# EAGLE board AutoSpiel (EAGLE 9.2.0)
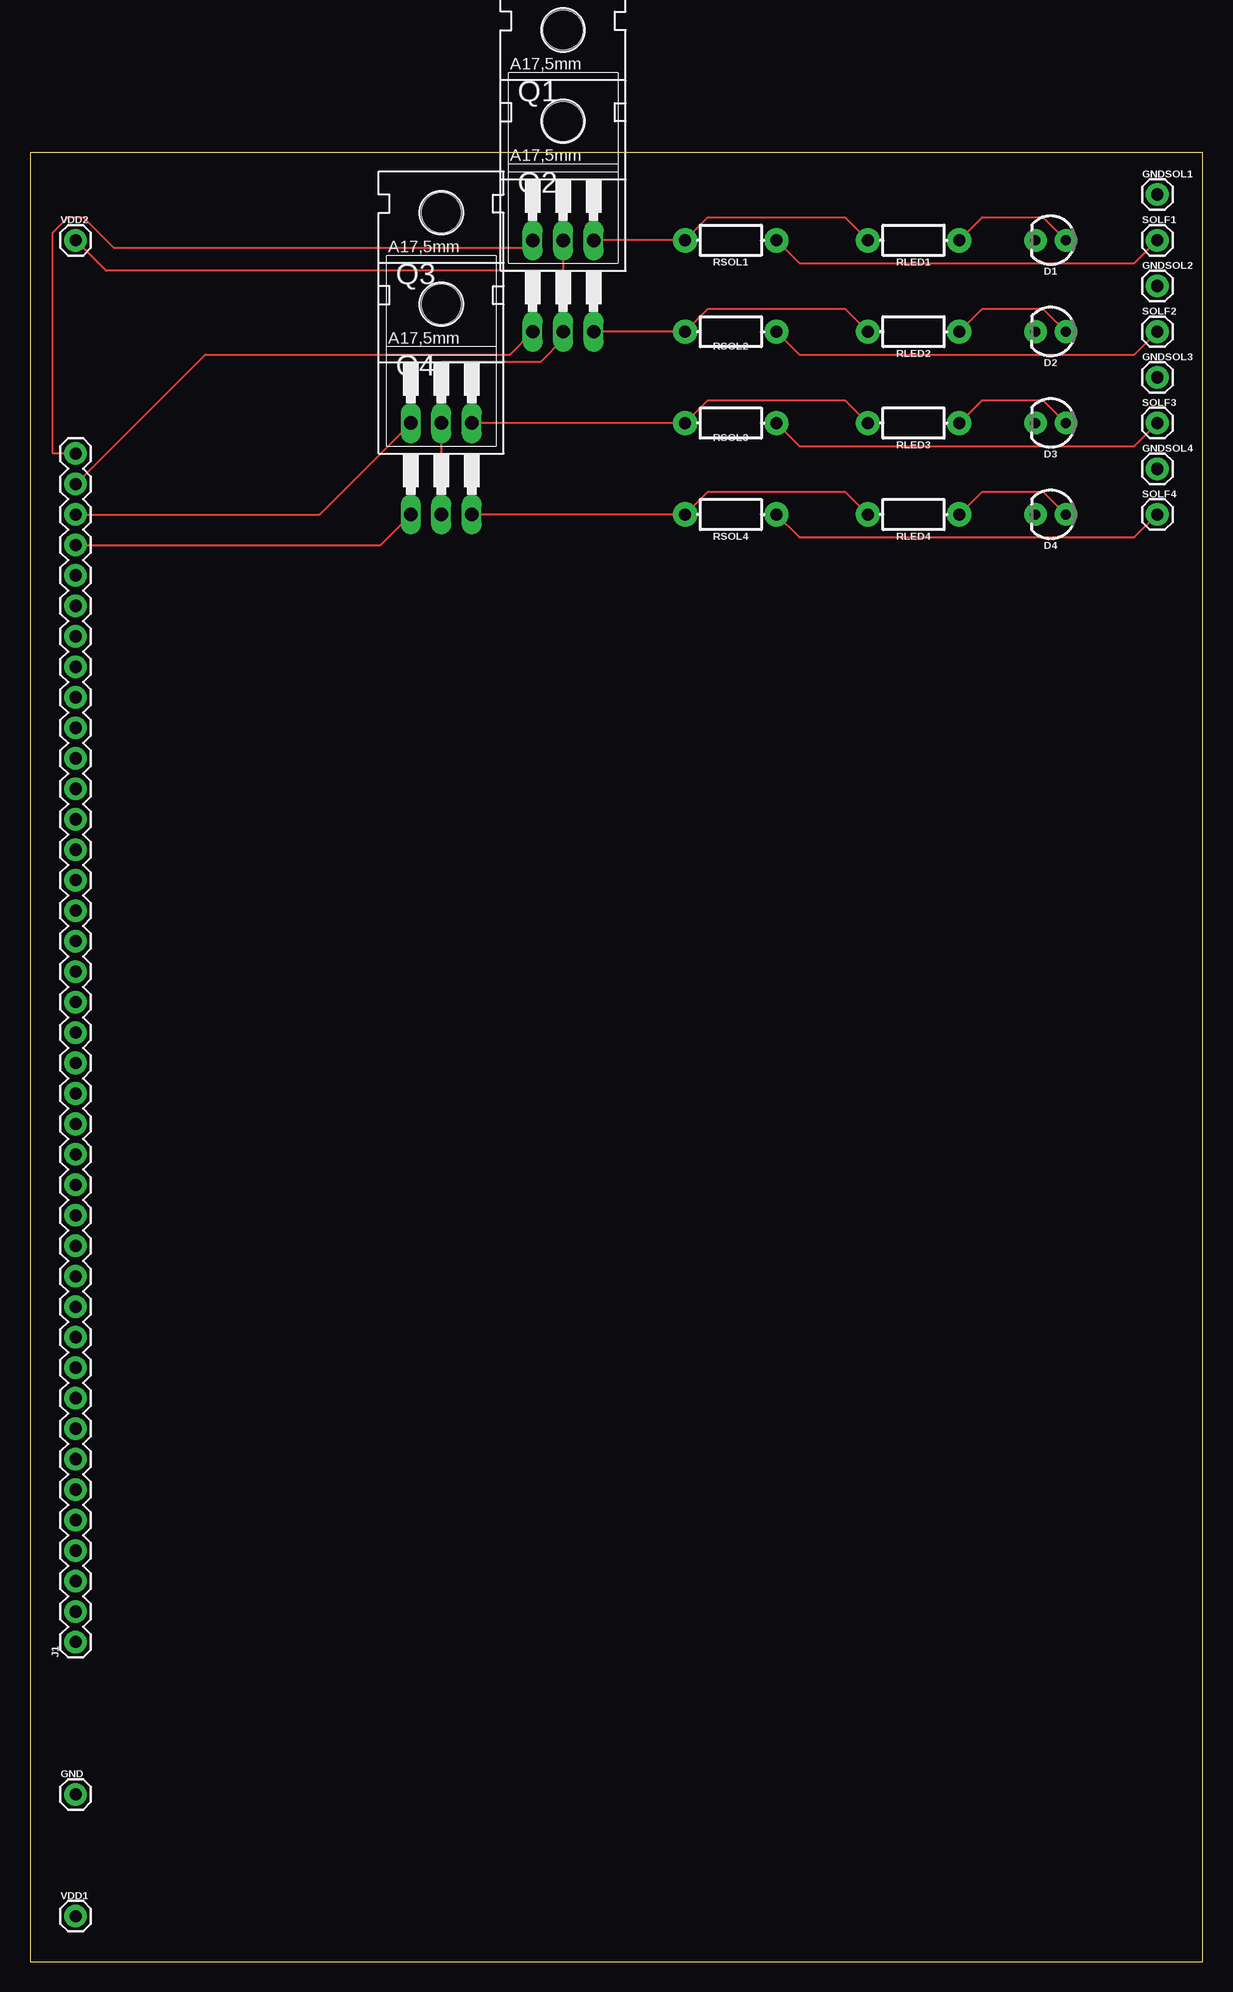
[diagram p0: board, top side]
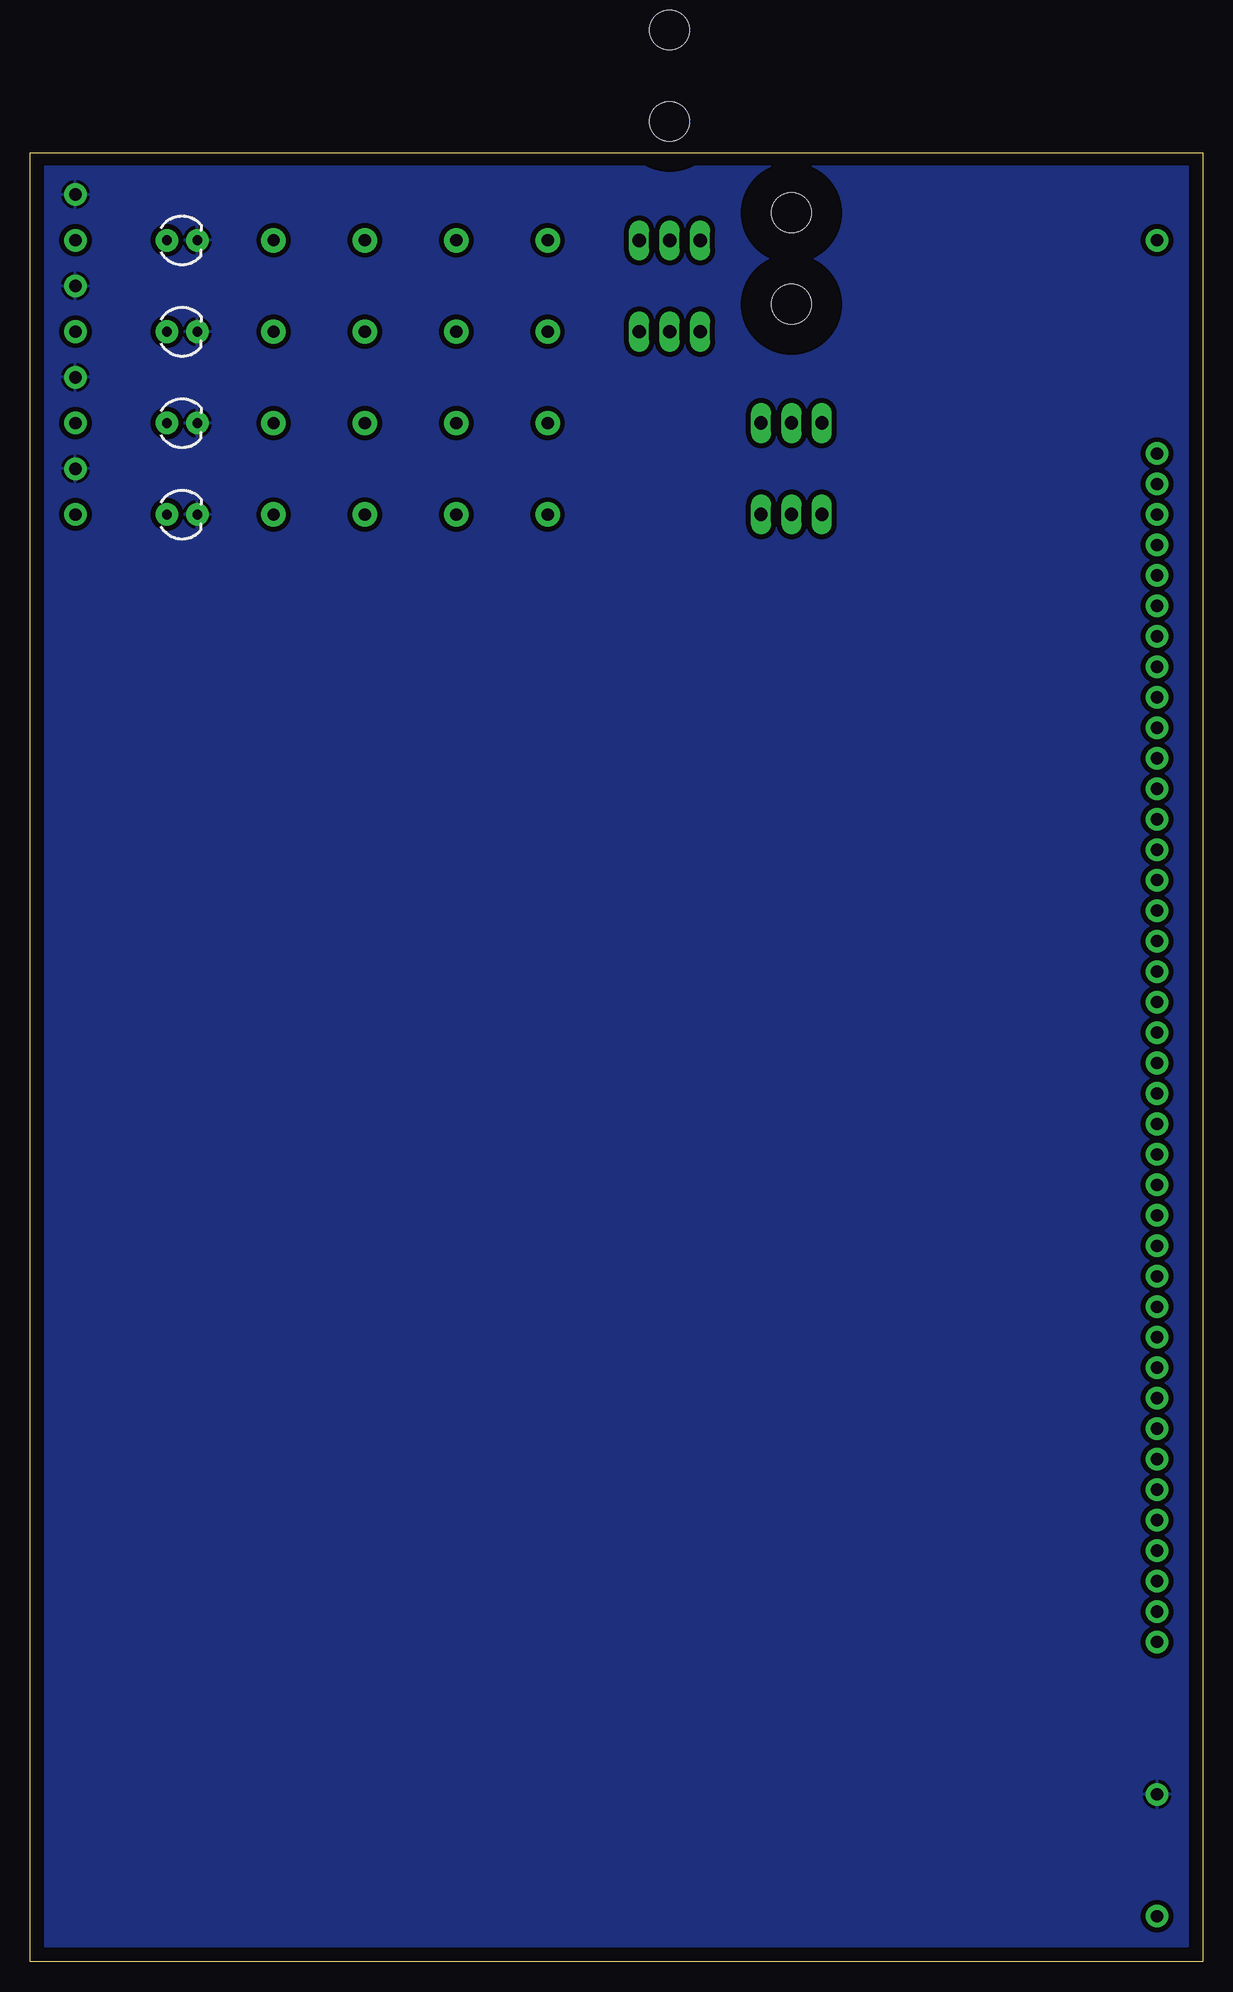
[diagram p1: board, bottom side, seen from below]

Size 97.77 x 150.8 mm. Coordinates in mm from the lower left corner, seen from the top.
Outline: 0,0 97.77,0 97.77,150.8 0,150.8 0,0
Copper layers (1*16): Top 0.035mm / dielectric 1.5mm / Bottom 0.035mm
Design rules "default *": minimum track width 6mil, minimum drill 0.35mm, track to track 16mil, track to pad 16mil, pad to pad 16mil, via to via 16mil, smd to smd 6mil, copper to edge 40mil, drill to drill 16mil, minimum pad ring 10mil, minimum via ring 8mil, stop-mask expansion 4mil, vias tented up to drill 0mil, thermal gap 10mil

## Footprints (pad centres in the part's own frame; a part is rotated, then mirrored left to right if it is on the bottom)
LED_3MM = drill 0.813 pad 1.88: A -1.27,0; K 1.27,0
1X01 = drill 1.016 pad 1.88: 1 0,0
1X40 = drill 1.016 pad 1.88: 1 0,0; 2 2.54,0; 3 5.08,0; 4 7.62,0; 5 10.16,0; 6 12.7,0; 7 15.24,0; 8 17.78,0; 9 20.32,0; 10 22.86,0; 11 25.4,0; 12 27.94,0; 13 30.48,0; 14 33.02,0; 15 35.56,0; 16 38.1,0; 17 40.64,0; 18 43.18,0; 19 45.72,0; 20 48.26,0; 21 50.8,0; 22 53.34,0; 23 55.88,0; 24 58.42,0; 25 60.96,0; 26 63.5,0; 27 66.04,0; 28 68.58,0; 29 71.12,0; 30 73.66,0; 31 76.2,0; 32 78.74,0; 33 81.28,0; 34 83.82,0; 35 86.36,0; 36 88.9,0; 37 91.44,0; 38 93.98,0; 39 96.52,0; 40 99.06,0
TO220AH = drill 1.118 long: B -2.54,-6.35; C 0,-6.35; E 2.54,-6.35 | hole 3.302: 0,11.176
AXIAL-0.3-KIT = drill 1.016 pad 2.032: P$1 -3.81,0; P$2 3.81,0

## Placement (x,y rotation side)
D1  [LED_3MM]  85.09,143.51 180 top
D2  [LED_3MM]  85.09,135.89 180 top
D3  [LED_3MM]  85.09,128.27 180 top
D4  [LED_3MM]  85.09,120.65 180 top
GND  [1X01]  3.81,13.97 0 top
GNDSOL1  [1X01]  93.98,147.32 0 top
GNDSOL2  [1X01]  93.98,139.7 0 top
GNDSOL3  [1X01]  93.98,132.08 0 top
GNDSOL4  [1X01]  93.98,124.46 0 top
J1  [1X40]  3.81,26.67 90 top
Q1  TIP120  [TO220AH]  44.45,149.86 0 top
Q2  TIP120  [TO220AH]  44.45,142.24 0 top
Q3  TIP120  [TO220AH]  34.29,134.62 0 top
Q4  TIP120  [TO220AH]  34.29,127 0 top
RLED1  10k  [AXIAL-0.3-KIT]  73.66,143.51 180 top
RLED2  10k  [AXIAL-0.3-KIT]  73.66,135.89 180 top
RLED3  10k  [AXIAL-0.3-KIT]  73.66,128.27 180 top
RLED4  10k  [AXIAL-0.3-KIT]  73.66,120.65 180 top
RSOL1  10k  [AXIAL-0.3-KIT]  58.42,143.51 180 top
RSOL2  10k  [AXIAL-0.3-KIT]  58.42,135.89 180 top
RSOL3  10k  [AXIAL-0.3-KIT]  58.42,128.27 180 top
RSOL4  10k  [AXIAL-0.3-KIT]  58.42,120.65 180 top
SOLF1  [1X01]  93.98,143.51 0 top
SOLF2  [1X01]  93.98,135.89 0 top
SOLF3  [1X01]  93.98,128.27 0 top
SOLF4  [1X01]  93.98,120.65 0 top
VDD1  [1X01]  3.81,3.81 0 top
VDD2  [1X01]  3.81,143.51 0 top

## Library data of the parts
D1-D4 = SparkFun-LED; PROD_ID: DIO-08794
GND GNDSOL1-GNDSOL4 J1 SOLF1-SOLF4 VDD1 VDD2 = SparkFun-Connectors
Q1-Q4 = transistor-power
RLED1-RLED4 RSOL1-RSOL4 = SparkFun-Resistors; PROD_ID: RES-09435

## Nets
A2: J1.36
A3: J1.24
A4: J1.12
A#2: J1.35
A#3: J1.23
A#4: J1.11
B2: J1.34
B3: J1.22
B4: J1.10
C3: J1.33
C4: J1.21
C5: J1.9
C#3: J1.32
C#4: J1.20
D3: J1.31
D4: J1.19
D#3: J1.30
D#4: J1.18
E3: J1.29
E4: J1.17
F2: J1.40 Q1.B
F3: J1.28
F4: J1.16
F#2: J1.39 Q2.B
F#3: J1.27
F#4: J1.15
G2: J1.38 Q3.B
G3: J1.26
G4: J1.14
G#2: J1.37 Q4.B
G#3: J1.25
G#4: J1.13
GND: D1.K D2.K D3.K D4.K GND.1 GNDSOL1.1 GNDSOL2.1 GNDSOL3.1 GNDSOL4.1
N$1: Q2.E RLED2.P$2 RSOL2.P$2
N$2: RSOL2.P$1 SOLF2.1
N$3: D2.A RLED2.P$1
N$4: Q3.E RLED3.P$2 RSOL3.P$2
N$5: RSOL3.P$1 SOLF3.1
N$6: Q1.E RLED1.P$2 RSOL1.P$2
N$7: D3.A RLED3.P$1
N$8: Q4.E RLED4.P$2 RSOL4.P$2
N$9: RSOL4.P$1 SOLF4.1
N$10: D4.A RLED4.P$1
N$37: RSOL1.P$1 SOLF1.1
N$38: D1.A RLED1.P$1
PP: J1.2
REPLAY: J1.1
SKIP: J1.3
VDD1: VDD1.1
VDD2: Q1.C Q2.C Q3.C Q4.C VDD2.1

## Tracks (layer width: path | path; a pad name or v marks a point on that pad's centre or on a via)
F2
  Top 0.152: Q1.B 41.28,142.88 6.98,142.88 4.45,145.42 3.17,145.42 1.91,144.14 1.91,125.73 J1.40
F#2
  Top 0.152: Q2.B 40.01,133.99 14.61,133.99 J1.39
G2
  Top 0.152: Q3.B 24.13,120.65 J1.38
G#2
  Top 0.152: Q4.B 29.21,118.11 J1.37
GND
  pour Bottom: 1.27,149.86 1.27,1.27 96.52,1.27 96.52,149.86
N$1
  Top 0.152: Q2.E RSOL2.P$2 56.52,137.8 67.94,137.8 RLED2.P$2
N$2
  Top 0.152: SOLF2.1 92.08,133.99 64.14,133.99 RSOL2.P$1
N$3
  Top 0.152: D2.A 84.46,137.8 79.38,137.8 RLED2.P$1
N$4
  Top 0.152: Q3.E RSOL3.P$2 56.52,130.18 67.94,130.18 RLED3.P$2
N$5
  Top 0.152: SOLF3.1 92.08,126.36 64.14,126.36 RSOL3.P$1
N$6
  Top 0.152: Q1.E RSOL1.P$2 56.52,145.42 67.94,145.42 RLED1.P$2
N$7
  Top 0.152: D3.A 84.46,130.18 79.38,130.18 RLED3.P$1
N$8
  Top 0.152: Q4.E RSOL4.P$2 56.52,122.56 67.94,122.56 RLED4.P$2
N$9
  Top 0.152: SOLF4.1 92.08,118.75 64.14,118.75 RSOL4.P$1
N$10
  Top 0.152: D4.A 84.46,122.56 79.38,122.56 RLED4.P$1
N$37
  Top 0.152: SOLF1.1 92.08,141.61 64.14,141.61 RSOL1.P$1
N$38
  Top 0.152: D1.A 84.46,145.42 79.38,145.42 RLED1.P$1
VDD2
  Top 0.152: Q4.C Q3.C 34.29,133.35 42.55,133.35 44.45,135.25 Q2.C 44.45,140.97 | Q1.C 44.45,140.97 | VDD2.1 6.35,140.97 44.45,140.97